# EAGLE board 4bit Arithmetic Unit (EAGLE 8.7.0)
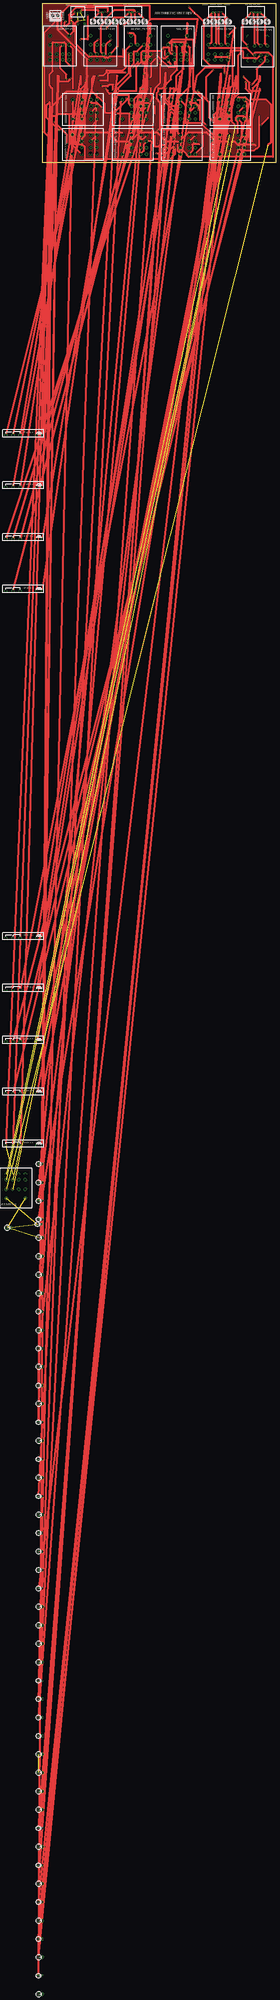
[diagram p0: board, top side]
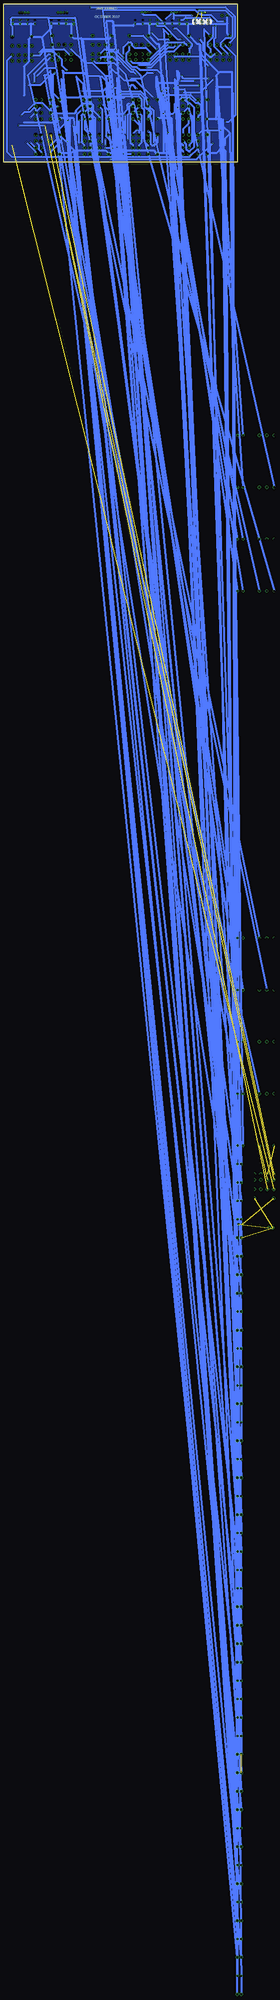
[diagram p1: board, bottom side, seen from below]

Size 161.27 x 108.89 mm. Coordinates in mm from the lower left corner, seen from the top.
Outline: 0,0 161.27,0 161.27,108.89 0,108.89 0,0
Copper layers (1*16): Top 0.07mm / dielectric 30mil / Bottom 0.07mm
Design rules "OSH_PARK_RULES_custom *": minimum track width 55mil, minimum drill 10mil, track to track 6mil, track to pad 6mil, pad to pad 6mil, via to via 6mil, smd to smd 6mil, copper to edge 15mil, drill to drill 6mil, minimum pad ring 7mil, minimum via ring 7mil, stop-mask expansion 3mil, vias tented up to drill 0mil, thermal gap 10mil

## Footprints (pad centres in the part's own frame; a part is rotated, then mirrored left to right if it is on the bottom)
RAD2,5 = drill 1.016: A 1.27,0; C -1.27,0
RAD2.5_D2 = drill 1.397: A 1.27,0; C -1.27,0
PY14-02 = drill 1.3: 11 6.6,6.35; 12 6.6,16.7; 14 6.6,12.7; 21 2.2,6.35; 22 2.2,16.7; 24 2.2,12.7; 31 -2.2,6.35; 32 -2.2,16.7; 34 -2.2,12.7; 41 -6.6,6.35; 42 -6.6,16.7; 44 -6.6,12.7; A1 6.6,0; A2 -6.6,0
HF41F-12-Z = drill 1: 1 27.04,1.2; 2 23.26,1.2 | drill 1.3: 3 11.92,1.2; 4 6.88,1.2; 5 1.84,1.2
LED3MM = drill 0.813 octagon: A -1.27,0; K 1.27,0
55932-0330 = drill 0.8: 1 2,0; 2 0,0; 3 -2,0
55932-0430 = drill 0.8: 1 3,0; 2 1,0; 3 -1,0; 4 -3,0
1751248 = drill 1.1 pad 1.7: 1 -1.75,-0.1; 2 1.75,-0.1

## Placement (x,y rotation side)
ADDER8-1:ADDER1-0:D1  1N4007  [RAD2,5]  -1.27,-943.6 0 top  (outside the outline)
ADDER8-1:ADDER1-0:D2  1N5359VERT_SML  [RAD2.5_D2]  -1.27,-994.4 0 top  (outside the outline)
ADDER8-1:ADDER1-0:D3  1N4007  [RAD2,5]  -1.27,-1045.2 0 top  (outside the outline)
ADDER8-1:ADDER1-0:D4  1N5359VERT_SML  [RAD2.5_D2]  -1.27,-1096 0 top  (outside the outline)
ADDER8-1:ADDER1-0:K1  PY14-02  [PY14-02]  20.83,12.19 270 top
ADDER8-1:ADDER1-0:K2  PY14-02  [PY14-02]  20.95,36.2 270 top
ADDER8-1:ADDER1-1:D1  1N4007  [RAD2,5]  -1.27,-956.3 0 top  (outside the outline)
ADDER8-1:ADDER1-1:D2  1N5359VERT_SML  [RAD2.5_D2]  -1.27,-1007.1 0 top  (outside the outline)
ADDER8-1:ADDER1-1:D3  1N4007  [RAD2,5]  -1.27,-1057.9 0 top  (outside the outline)
ADDER8-1:ADDER1-1:D4  1N5359VERT_SML  [RAD2.5_D2]  -1.27,-1108.7 0 top  (outside the outline)
ADDER8-1:ADDER1-1:K1  PY14-02  [PY14-02]  55.24,12.06 270 top
ADDER8-1:ADDER1-1:K2  PY14-02  [PY14-02]  55.24,36.2 270 top
ADDER8-1:ADDER1-2:D1  1N4007  [RAD2,5]  -1.27,-969 0 top  (outside the outline)
ADDER8-1:ADDER1-2:D2  1N5359VERT_SML  [RAD2.5_D2]  -1.27,-1019.8 0 top  (outside the outline)
ADDER8-1:ADDER1-2:D3  1N4007  [RAD2,5]  -1.27,-1070.6 0 top  (outside the outline)
ADDER8-1:ADDER1-2:D4  1N5359VERT_SML  [RAD2.5_D2]  -1.27,-1121.4 0 top  (outside the outline)
ADDER8-1:ADDER1-2:K1  PY14-02  [PY14-02]  88.9,12.06 270 top
ADDER8-1:ADDER1-2:K2  PY14-02  [PY14-02]  88.9,36.2 270 top
ADDER8-1:ADDER1-3:D1  1N4007  [RAD2,5]  -1.27,-981.7 0 top  (outside the outline)
ADDER8-1:ADDER1-3:D2  1N5359VERT_SML  [RAD2.5_D2]  -1.27,-1032.5 0 top  (outside the outline)
ADDER8-1:ADDER1-3:D3  1N4007  [RAD2,5]  -1.27,-1083.3 0 top  (outside the outline)
ADDER8-1:ADDER1-3:D4  1N5359VERT_SML  [RAD2.5_D2]  -1.27,-1134.1 0 top  (outside the outline)
ADDER8-1:ADDER1-3:K1  PY14-02  [PY14-02]  122.56,12.06 270 top
ADDER8-1:ADDER1-3:K2  PY14-02  [PY14-02]  122.56,36.2 270 top
ADDER8-1:D1  1N4007  [RAD2,5]  -1.27,-1248.4 0 top  (outside the outline)
ADDER8-1:D2  1N5359VERT_SML  [RAD2.5_D2]  -1.27,-1261.1 0 top  (outside the outline)
ADDER8-1:D3  1N4007  [RAD2,5]  -2.03,-731.01 0 top  (outside the outline)
ADDER8-1:D4  1N5359VERT_SML  [RAD2.5_D2]  -22.86,-733.55 0 top  (outside the outline)
ADDER8-1:K1  HF41F-12-Z  [HF41F-12-Z]  -27.04,-678.1 0 top  (outside the outline)
ADDER8-1:K2  PY14-02  [PY14-02]  -18.29,-713.23 0 top  (outside the outline)
ENABLE4-1:D1  1N4007  [RAD2,5]  -1.27,-689.6 0 top  (outside the outline)
ENABLE4-1:D2  1N5359VERT_SML  [RAD2.5_D2]  -1.27,-740.4 0 top  (outside the outline)
ENABLE4-1:K1  PY14-02  [PY14-02]  12.06,87 180 top
ENABLE4-2:D1  1N4007  [RAD2,5]  -1.27,-702.3 0 top  (outside the outline)
ENABLE4-2:D2  1N5359VERT_SML  [RAD2.5_D2]  -1.27,-753.1 0 top  (outside the outline)
ENABLE4-2:K1  PY14-02  [PY14-02]  40.01,87 180 top
ENABLE4-3:D1  1N4007  [RAD2,5]  -1.27,-715 0 top  (outside the outline)
ENABLE4-3:D2  1N5359VERT_SML  [RAD2.5_D2]  -1.27,-765.8 0 top  (outside the outline)
ENABLE4-3:K1  PY14-02  [PY14-02]  121.28,87 180 top
ENABLE4-4:D1  1N4007  [RAD2,5]  -1.27,-727.7 0 top  (outside the outline)
ENABLE4-4:D2  1N5359VERT_SML  [RAD2.5_D2]  -1.27,-778.5 0 top  (outside the outline)
ENABLE4-4:K1  PY14-02  [PY14-02]  148.59,86.36 180 top
INC/DEC_FILTER1:D1  1N4007  [RAD2,5]  -1.27,-791.2 0 top  (outside the outline)
INC/DEC_FILTER1:D2  1N5359VERT_SML  [RAD2.5_D2]  -1.27,-803.9 0 top  (outside the outline)
INC/DEC_FILTER1:K1  PY14-02  [PY14-02]  67.94,87 180 top
INPUT3-1:LED0  [LED3MM]  29.21,96.52 270 bottom
INPUT3-1:LED1  [LED3MM]  24.64,96.52 270 bottom
INPUT3-1:LED2  [LED3MM]  20.07,96.52 270 bottom
INPUT3-1:X1  55932-0330  [55932-0330]  24.51,102.87 180 top
INPUT4-1:LED0  [LED3MM]  50.16,96.52 270 top
INPUT4-1:LED1  [LED3MM]  45.09,96.52 270 top
INPUT4-1:LED2  [LED3MM]  40.01,96.52 270 top
INPUT4-1:LED3  [LED3MM]  34.92,96.52 270 top
INPUT4-1:X1  55932-0430  [55932-0430]  42.55,102.87 180 top
INPUT4-2:LED0  [LED3MM]  70.48,96.52 270 top
INPUT4-2:LED1  [LED3MM]  65.41,96.52 270 top
INPUT4-2:LED2  [LED3MM]  60.33,96.52 270 top
INPUT4-2:LED3  [LED3MM]  55.24,96.52 270 top
INPUT4-2:X1  55932-0430  [55932-0430]  62.87,102.87 180 top
OUTPUT4-1:LED0  [LED3MM]  154.94,96.52 270 top
OUTPUT4-1:LED1  [LED3MM]  149.86,96.52 270 top
OUTPUT4-1:LED2  [LED3MM]  144.78,96.52 270 top
OUTPUT4-1:LED3  [LED3MM]  139.7,96.52 270 top
OUTPUT4-1:X1  55932-0430  [55932-0430]  147.32,102.87 180 top
OUTPUT4-2:LED0  [LED3MM]  128.27,96.52 270 top
OUTPUT4-2:LED1  [LED3MM]  123.19,96.52 270 top
OUTPUT4-2:LED2  [LED3MM]  118.11,96.52 270 top
OUTPUT4-2:LED3  [LED3MM]  113.03,96.52 270 top
OUTPUT4-2:X1  55932-0430  [55932-0430]  120.65,102.87 180 top
PWR_BLK:PWR  PWR_BLK  [1751248]  8.89,100.97 0 top
SUB_XOR1:D1  1N4007  [RAD2,5]  -1.27,-816.6 0 top  (outside the outline)
SUB_XOR1:D2  1N5359VERT_SML  [RAD2.5_D2]  -1.27,-829.3 0 top  (outside the outline)
SUB_XOR1:D3  1N4007  [RAD2,5]  -1.27,-842 0 top  (outside the outline)
SUB_XOR1:D4  1N5359VERT_SML  [RAD2.5_D2]  -1.27,-854.7 0 top  (outside the outline)
SUB_XOR1:D5  1N4007  [RAD2,5]  -1.27,-867.4 0 top  (outside the outline)
SUB_XOR1:D6  1N5359VERT_SML  [RAD2.5_D2]  -1.27,-880.1 0 top  (outside the outline)
SUB_XOR1:D7  1N4007  [RAD2,5]  -1.27,-892.8 0 top  (outside the outline)
SUB_XOR1:D8  1N5359VERT_SML  [RAD2.5_D2]  -1.27,-905.5 0 top  (outside the outline)
SUB_XOR1:D9  1N4007  [RAD2,5]  -1.27,-918.2 0 top  (outside the outline)
SUB_XOR1:D10  1N5359VERT_SML  [RAD2.5_D2]  -1.27,-930.9 0 top  (outside the outline)
SUB_XOR1:K1  PY14-02  [PY14-02]  93.34,87 180 top
SUB_XOR1:K2  HF41F-12-Z  [HF41F-12-Z]  -27.04,-189.3 0 top  (outside the outline)
SUB_XOR1:K3  HF41F-12-Z  [HF41F-12-Z]  -27.04,-225 0 top  (outside the outline)
SUB_XOR1:K4  HF41F-12-Z  [HF41F-12-Z]  -27.04,-260.7 0 top  (outside the outline)
SUB_XOR1:K5  HF41F-12-Z  [HF41F-12-Z]  -27.04,-296.4 0 top  (outside the outline)
ZERO_DETECT1:D1  1N4007  [RAD2,5]  -1.27,-1146.8 0 top  (outside the outline)
ZERO_DETECT1:D2  1N5359VERT_SML  [RAD2.5_D2]  -1.27,-1159.5 0 top  (outside the outline)
ZERO_DETECT1:D3  1N4007  [RAD2,5]  -1.27,-1172.2 0 top  (outside the outline)
ZERO_DETECT1:D4  1N5359VERT_SML  [RAD2.5_D2]  -1.27,-1184.9 0 top  (outside the outline)
ZERO_DETECT1:D5  1N4007  [RAD2,5]  -1.27,-1197.6 0 top  (outside the outline)
ZERO_DETECT1:D6  1N5359VERT_SML  [RAD2.5_D2]  -1.27,-1210.3 0 top  (outside the outline)
ZERO_DETECT1:D7  1N4007  [RAD2,5]  -1.27,-1223 0 top  (outside the outline)
ZERO_DETECT1:D8  1N5359VERT_SML  [RAD2.5_D2]  -1.27,-1235.7 0 top  (outside the outline)
ZERO_DETECT1:K1  HF41F-12-Z  [HF41F-12-Z]  -27.04,-535.3 0 top  (outside the outline)
ZERO_DETECT1:K2  HF41F-12-Z  [HF41F-12-Z]  -27.04,-571 0 top  (outside the outline)
ZERO_DETECT1:K3  HF41F-12-Z  [HF41F-12-Z]  -27.04,-606.7 0 top  (outside the outline)
ZERO_DETECT1:K4  HF41F-12-Z  [HF41F-12-Z]  -27.04,-642.4 0 top  (outside the outline)

## Library data of the parts
ADDER8-1:ADDER1-0:D1-ADDER8-1:ADDER1-0:D4 ADDER8-1:ADDER1-0:K1 ADDER8-1:ADDER1-0:K2 ADDER8-1:ADDER1-1:D1-ADDER8-1:ADDER1-1:D4 ADDER8-1:ADDER1-1:K1 ADDER8-1:ADDER1-1:K2 ADDER8-1:ADDER1-2:D1-ADDER8-1:ADDER1-2:D4 ADDER8-1:ADDER1-2:K1 ADDER8-1:ADDER1-2:K2 ADDER8-1:ADDER1-3:D1-ADDER8-1:ADDER1-3:D4 ADDER8-1:ADDER1-3:K1 ADDER8-1:ADDER1-3:K2 ADDER8-1:D1-ADDER8-1:D4 ADDER8-1:K1 ADDER8-1:K2 ENABLE4-1:D1 ENABLE4-1:D2 ENABLE4-1:K1 ENABLE4-2:D1 ENABLE4-2:D2 ENABLE4-2:K1 ENABLE4-3:D1 ENABLE4-3:D2 ENABLE4-3:K1 ENABLE4-4:D1 ENABLE4-4:D2 ENABLE4-4:K1 INC/DEC_FILTER1:D1 INC/DEC_FILTER1:D2 INC/DEC_FILTER1:K1 INPUT3-1:LED0 INPUT3-1:LED1 INPUT3-1:LED2 INPUT3-1:X1 INPUT4-1:LED0 INPUT4-1:LED1-INPUT4-1:LED3 INPUT4-1:X1 INPUT4-2:LED0 INPUT4-2:LED1-INPUT4-2:LED3 INPUT4-2:X1 OUTPUT4-1:LED0 OUTPUT4-1:LED1-OUTPUT4-1:LED3 OUTPUT4-1:X1 OUTPUT4-2:LED0 OUTPUT4-2:LED1-OUTPUT4-2:LED3 OUTPUT4-2:X1 SUB_XOR1:D1-SUB_XOR1:D10 SUB_XOR1:K1-SUB_XOR1:K5 ZERO_DETECT1:D1-ZERO_DETECT1:D8 ZERO_DETECT1:K1-ZERO_DETECT1:K4 = relay_computer_custom
PWR_BLK:PWR = relay_computer_custom; OC_FARNELL: unknown; OC_NEWARK: unknown

## Nets
+12V: ADDER8-1:ADDER1-0:K1.31 ADDER8-1:ADDER1-1:K1.31 ADDER8-1:ADDER1-2:K1.31 ADDER8-1:ADDER1-3:K1.31 ADDER8-1:K1.4 INC/DEC_FILTER1:K1.44 PWR_BLK:PWR.2 SUB_XOR1:K2.4 SUB_XOR1:K3.4 SUB_XOR1:K4.4 SUB_XOR1:K5.4
ADDER8-1:ADDER1-0:D$1: ADDER8-1:ADDER1-0:D1.A ADDER8-1:ADDER1-0:D2.A
ADDER8-1:ADDER1-0:D$2: ADDER8-1:ADDER1-0:D3.A ADDER8-1:ADDER1-0:D4.A
ADDER8-1:ADDER1-0:N$1: ADDER8-1:ADDER1-0:K1.12 ADDER8-1:ADDER1-0:K2.44
ADDER8-1:ADDER1-0:N$2: ADDER8-1:ADDER1-0:K1.14 ADDER8-1:ADDER1-0:K1.32 ADDER8-1:ADDER1-0:K2.42
ADDER8-1:ADDER1-0:N$3: ADDER8-1:ADDER1-0:K1.22 ADDER8-1:ADDER1-0:K2.22 ADDER8-1:ADDER1-0:K2.34
ADDER8-1:ADDER1-0:N$4: ADDER8-1:ADDER1-0:K1.24 ADDER8-1:ADDER1-0:K2.24 ADDER8-1:ADDER1-0:K2.32
ADDER8-1:ADDER1-0:N$5: ADDER8-1:ADDER1-0:K1.44 ADDER8-1:ADDER1-0:K2.12
ADDER8-1:ADDER1-0:N$6: ADDER8-1:ADDER1-0:K1.34 ADDER8-1:ADDER1-0:K1.42 ADDER8-1:ADDER1-0:K2.14
ADDER8-1:ADDER1-1:D$1: ADDER8-1:ADDER1-1:D1.A ADDER8-1:ADDER1-1:D2.A
ADDER8-1:ADDER1-1:D$2: ADDER8-1:ADDER1-1:D3.A ADDER8-1:ADDER1-1:D4.A
ADDER8-1:ADDER1-1:N$1: ADDER8-1:ADDER1-1:K1.12 ADDER8-1:ADDER1-1:K2.44
ADDER8-1:ADDER1-1:N$2: ADDER8-1:ADDER1-1:K1.14 ADDER8-1:ADDER1-1:K1.32 ADDER8-1:ADDER1-1:K2.42
ADDER8-1:ADDER1-1:N$3: ADDER8-1:ADDER1-1:K1.22 ADDER8-1:ADDER1-1:K2.22 ADDER8-1:ADDER1-1:K2.34
ADDER8-1:ADDER1-1:N$4: ADDER8-1:ADDER1-1:K1.24 ADDER8-1:ADDER1-1:K2.24 ADDER8-1:ADDER1-1:K2.32
ADDER8-1:ADDER1-1:N$5: ADDER8-1:ADDER1-1:K1.44 ADDER8-1:ADDER1-1:K2.12
ADDER8-1:ADDER1-1:N$6: ADDER8-1:ADDER1-1:K1.34 ADDER8-1:ADDER1-1:K1.42 ADDER8-1:ADDER1-1:K2.14
ADDER8-1:ADDER1-2:D$1: ADDER8-1:ADDER1-2:D1.A ADDER8-1:ADDER1-2:D2.A
ADDER8-1:ADDER1-2:D$2: ADDER8-1:ADDER1-2:D3.A ADDER8-1:ADDER1-2:D4.A
ADDER8-1:ADDER1-2:N$1: ADDER8-1:ADDER1-2:K1.12 ADDER8-1:ADDER1-2:K2.44
ADDER8-1:ADDER1-2:N$2: ADDER8-1:ADDER1-2:K1.14 ADDER8-1:ADDER1-2:K1.32 ADDER8-1:ADDER1-2:K2.42
ADDER8-1:ADDER1-2:N$3: ADDER8-1:ADDER1-2:K1.22 ADDER8-1:ADDER1-2:K2.22 ADDER8-1:ADDER1-2:K2.34
ADDER8-1:ADDER1-2:N$4: ADDER8-1:ADDER1-2:K1.24 ADDER8-1:ADDER1-2:K2.24 ADDER8-1:ADDER1-2:K2.32
ADDER8-1:ADDER1-2:N$5: ADDER8-1:ADDER1-2:K1.44 ADDER8-1:ADDER1-2:K2.12
ADDER8-1:ADDER1-2:N$6: ADDER8-1:ADDER1-2:K1.34 ADDER8-1:ADDER1-2:K1.42 ADDER8-1:ADDER1-2:K2.14
ADDER8-1:ADDER1-3:D$1: ADDER8-1:ADDER1-3:D1.A ADDER8-1:ADDER1-3:D2.A
ADDER8-1:ADDER1-3:D$2: ADDER8-1:ADDER1-3:D3.A ADDER8-1:ADDER1-3:D4.A
ADDER8-1:ADDER1-3:N$1: ADDER8-1:ADDER1-3:K1.12 ADDER8-1:ADDER1-3:K2.44
ADDER8-1:ADDER1-3:N$2: ADDER8-1:ADDER1-3:K1.14 ADDER8-1:ADDER1-3:K1.32 ADDER8-1:ADDER1-3:K2.42
ADDER8-1:ADDER1-3:N$3: ADDER8-1:ADDER1-3:K1.22 ADDER8-1:ADDER1-3:K2.22 ADDER8-1:ADDER1-3:K2.34
ADDER8-1:ADDER1-3:N$4: ADDER8-1:ADDER1-3:K1.24 ADDER8-1:ADDER1-3:K2.24 ADDER8-1:ADDER1-3:K2.32
ADDER8-1:ADDER1-3:N$5: ADDER8-1:ADDER1-3:K1.44 ADDER8-1:ADDER1-3:K2.12
ADDER8-1:ADDER1-3:N$6: ADDER8-1:ADDER1-3:K1.34 ADDER8-1:ADDER1-3:K1.42 ADDER8-1:ADDER1-3:K2.14
ADDER8-1:D$1: ADDER8-1:D1.A ADDER8-1:D2.A
ADDER8-1:D$2: ADDER8-1:D3.A ADDER8-1:D4.A
ADDER8-1:IN: ADDER8-1:D3.C ADDER8-1:K2.A2
ADDER8-1:IN1: ADDER8-1:ADDER1-2:K2.11 ADDER8-1:ADDER1-3:K1.41 ADDER8-1:ADDER1-3:K2.21 ADDER8-1:K2.42
ADDER8-1:N$1: ADDER8-1:ADDER1-0:K2.11 ADDER8-1:ADDER1-1:K1.41 ADDER8-1:ADDER1-1:K2.21
ADDER8-1:N$2: ADDER8-1:ADDER1-0:K2.41 ADDER8-1:ADDER1-1:K1.11 ADDER8-1:ADDER1-1:K2.31
ADDER8-1:N$3: ADDER8-1:ADDER1-1:K2.11 ADDER8-1:ADDER1-2:K1.41 ADDER8-1:ADDER1-2:K2.21
ADDER8-1:N$4: ADDER8-1:ADDER1-1:K2.41 ADDER8-1:ADDER1-2:K1.11 ADDER8-1:ADDER1-2:K2.31
ADDER8-1:N$5: ADDER8-1:ADDER1-3:K2.11
ADDER8-1:N$6: ADDER8-1:ADDER1-2:K2.41 ADDER8-1:ADDER1-3:K1.11 ADDER8-1:ADDER1-3:K2.31 ADDER8-1:K2.44
ADDER8-1:N$7: ADDER8-1:ADDER1-0:K1.11 ADDER8-1:ADDER1-0:K2.31 ADDER8-1:K1.3 ADDER8-1:K2.34
ADDER8-1:N$8: ADDER8-1:ADDER1-3:K2.41
ADDER8-1:N$9: ADDER8-1:ADDER1-0:K1.41 ADDER8-1:ADDER1-0:K2.21 ADDER8-1:K1.5 ADDER8-1:K2.32
AUE: ENABLE4-1:D1.C ENABLE4-1:K1.A2 ENABLE4-2:D1.C ENABLE4-2:K1.A2 ENABLE4-3:D1.C ENABLE4-3:K1.A2 ENABLE4-4:D1.C ENABLE4-4:K1.A2 INPUT3-1:LED2.A INPUT3-1:X1.1
CARRY: ENABLE4-3:K1.11 OUTPUT4-2:LED3.A OUTPUT4-2:X1.1
ENABLE4-1:D$1: ENABLE4-1:D1.A ENABLE4-1:D2.A
ENABLE4-2:D$1: ENABLE4-2:D1.A ENABLE4-2:D2.A
ENABLE4-3:D$1: ENABLE4-3:D1.A ENABLE4-3:D2.A
ENABLE4-4:D$1: ENABLE4-4:D1.A ENABLE4-4:D2.A
GND: ADDER8-1:ADDER1-0:D2.C ADDER8-1:ADDER1-0:D4.C ADDER8-1:ADDER1-0:K1.A1 ADDER8-1:ADDER1-0:K2.A1 ADDER8-1:ADDER1-1:D2.C ADDER8-1:ADDER1-1:D4.C ADDER8-1:ADDER1-1:K1.A1 ADDER8-1:ADDER1-1:K2.A1 ADDER8-1:ADDER1-2:D2.C ADDER8-1:ADDER1-2:D4.C ADDER8-1:ADDER1-2:K1.A1 ADDER8-1:ADDER1-2:K2.A1 ADDER8-1:ADDER1-3:D2.C ADDER8-1:ADDER1-3:D4.C ADDER8-1:ADDER1-3:K1.A1 ADDER8-1:ADDER1-3:K2.A1 ADDER8-1:D2.C ADDER8-1:D4.C ADDER8-1:K1.2 ADDER8-1:K2.A1 ENABLE4-1:D2.C ENABLE4-1:K1.A1 ENABLE4-2:D2.C ENABLE4-2:K1.A1 ENABLE4-3:D2.C ENABLE4-3:K1.A1 ENABLE4-4:D2.C ENABLE4-4:K1.A1 INC/DEC_FILTER1:D2.C INC/DEC_FILTER1:K1.A1 INPUT3-1:LED0.K INPUT3-1:LED1.K INPUT3-1:LED2.K INPUT4-1:LED0.K INPUT4-1:LED1.K INPUT4-1:LED2.K INPUT4-1:LED3.K INPUT4-2:LED0.K INPUT4-2:LED1.K INPUT4-2:LED2.K INPUT4-2:LED3.K OUTPUT4-1:LED0.K OUTPUT4-1:LED1.K OUTPUT4-1:LED2.K OUTPUT4-1:LED3.K OUTPUT4-2:LED0.K OUTPUT4-2:LED1.K OUTPUT4-2:LED2.K OUTPUT4-2:LED3.K PWR_BLK:PWR.1 SUB_XOR1:D2.C SUB_XOR1:D4.C SUB_XOR1:D6.C SUB_XOR1:D8.C SUB_XOR1:D10.C SUB_XOR1:K1.A1 SUB_XOR1:K2.2 SUB_XOR1:K3.2 SUB_XOR1:K4.2 SUB_XOR1:K5.2
INC/DEC: INC/DEC_FILTER1:D1.C INC/DEC_FILTER1:K1.A2 INPUT3-1:LED0.A INPUT3-1:X1.3
INC/DEC_FILTER1:D$1: INC/DEC_FILTER1:D1.A INC/DEC_FILTER1:D2.A
INPUT3-1:IN1: INPUT3-1:LED1.A INPUT3-1:X1.2
N$1: ENABLE4-1:K1.44 INPUT4-1:LED0.A INPUT4-1:X1.4
N$2: ENABLE4-1:K1.34 INPUT4-1:LED1.A INPUT4-1:X1.3
N$3: ENABLE4-1:K1.24 INPUT4-1:LED2.A INPUT4-1:X1.2
N$4: ENABLE4-1:K1.14 INPUT4-1:LED3.A INPUT4-1:X1.1
N$5: ENABLE4-2:K1.44 INPUT4-2:LED0.A INPUT4-2:X1.4
N$6: ENABLE4-2:K1.34 INPUT4-2:LED1.A INPUT4-2:X1.3
N$7: ENABLE4-2:K1.24 INPUT4-2:LED2.A INPUT4-2:X1.2
N$8: ENABLE4-2:K1.14 INPUT4-2:LED3.A INPUT4-2:X1.1
N$9: ENABLE4-2:K1.11 INC/DEC_FILTER1:K1.12
N$10: ENABLE4-2:K1.21 INC/DEC_FILTER1:K1.22
N$11: ENABLE4-2:K1.31 INC/DEC_FILTER1:K1.32
N$12: ENABLE4-2:K1.41 INC/DEC_FILTER1:K1.42
N$13: ADDER8-1:ADDER1-0:D3.C ADDER8-1:ADDER1-0:K2.A2 ENABLE4-1:K1.41
N$14: ADDER8-1:ADDER1-1:D3.C ADDER8-1:ADDER1-1:K2.A2 ENABLE4-1:K1.31
N$15: ADDER8-1:ADDER1-2:D3.C ADDER8-1:ADDER1-2:K2.A2 ENABLE4-1:K1.21
N$16: ADDER8-1:ADDER1-3:D3.C ADDER8-1:ADDER1-3:K2.A2 ENABLE4-1:K1.11
N$17: INC/DEC_FILTER1:K1.41 SUB_XOR1:D9.C SUB_XOR1:K5.1
N$18: INC/DEC_FILTER1:K1.31 SUB_XOR1:D7.C SUB_XOR1:K4.1
N$19: INC/DEC_FILTER1:K1.21 SUB_XOR1:D5.C SUB_XOR1:K3.1
N$20: INC/DEC_FILTER1:K1.11 SUB_XOR1:D3.C SUB_XOR1:K2.1
N$21: ADDER8-1:ADDER1-3:D1.C ADDER8-1:ADDER1-3:K1.A2 SUB_XOR1:K1.11
N$22: ADDER8-1:ADDER1-2:D1.C ADDER8-1:ADDER1-2:K1.A2 SUB_XOR1:K1.21
N$23: ADDER8-1:ADDER1-1:D1.C ADDER8-1:ADDER1-1:K1.A2 SUB_XOR1:K1.31
N$24: ADDER8-1:ADDER1-0:D1.C ADDER8-1:ADDER1-0:K1.A2 SUB_XOR1:K1.41
N$25: ADDER8-1:K2.31 ENABLE4-3:K1.14
N$26: ENABLE4-3:K1.44 ZERO_DETECT1:K4.3
N$40: ADDER8-1:ADDER1-0:K1.21 ENABLE4-4:K1.44 ZERO_DETECT1:D7.C ZERO_DETECT1:K4.1
N$41: ADDER8-1:ADDER1-1:K1.21 ENABLE4-4:K1.34 ZERO_DETECT1:D5.C ZERO_DETECT1:K3.1
N$42: ADDER8-1:ADDER1-2:K1.21 ENABLE4-4:K1.24 ZERO_DETECT1:D3.C ZERO_DETECT1:K2.1
N$43: ADDER8-1:ADDER1-3:K1.21 ENABLE4-3:K1.34 ENABLE4-4:K1.14 ZERO_DETECT1:D1.C ZERO_DETECT1:K1.1
N$44: ADDER8-1:K2.41 ENABLE4-3:K1.24
OVERFLOW: ENABLE4-3:K1.21 OUTPUT4-2:LED2.A OUTPUT4-2:X1.2
R0: ENABLE4-4:K1.41 OUTPUT4-1:LED0.A OUTPUT4-1:X1.4
R1: ENABLE4-4:K1.31 OUTPUT4-1:LED1.A OUTPUT4-1:X1.3
R2: ENABLE4-4:K1.21 OUTPUT4-1:LED2.A OUTPUT4-1:X1.2
R3: ENABLE4-4:K1.11 OUTPUT4-1:LED3.A OUTPUT4-1:X1.1
SIGN: ENABLE4-3:K1.31 OUTPUT4-2:LED1.A OUTPUT4-2:X1.3
SUB: ADDER8-1:D1.C ADDER8-1:K1.1 SUB_XOR1:D1.C SUB_XOR1:K1.A2
SUB_XOR1:D$1: SUB_XOR1:D1.A SUB_XOR1:D2.A
SUB_XOR1:D$2: SUB_XOR1:D3.A SUB_XOR1:D4.A
SUB_XOR1:D$3: SUB_XOR1:D5.A SUB_XOR1:D6.A
SUB_XOR1:D$4: SUB_XOR1:D7.A SUB_XOR1:D8.A
SUB_XOR1:D$5: SUB_XOR1:D9.A SUB_XOR1:D10.A
SUB_XOR1:N$1: SUB_XOR1:K1.42 SUB_XOR1:K5.5
SUB_XOR1:N$2: SUB_XOR1:K1.44 SUB_XOR1:K5.3
SUB_XOR1:N$3: SUB_XOR1:K1.34 SUB_XOR1:K4.3
SUB_XOR1:N$4: SUB_XOR1:K1.32 SUB_XOR1:K4.5
SUB_XOR1:N$5: SUB_XOR1:K1.24 SUB_XOR1:K3.3
SUB_XOR1:N$6: SUB_XOR1:K1.22 SUB_XOR1:K3.5
SUB_XOR1:N$7: SUB_XOR1:K1.14 SUB_XOR1:K2.3
SUB_XOR1:N$8: SUB_XOR1:K1.12 SUB_XOR1:K2.5
ZERO: ENABLE4-3:K1.41 OUTPUT4-2:LED0.A OUTPUT4-2:X1.4
ZERO_DETECT1:+12V: ZERO_DETECT1:K1.4
ZERO_DETECT1:D$1: ZERO_DETECT1:D1.A ZERO_DETECT1:D2.A
ZERO_DETECT1:D$2: ZERO_DETECT1:D3.A ZERO_DETECT1:D4.A
ZERO_DETECT1:D$3: ZERO_DETECT1:D5.A ZERO_DETECT1:D6.A
ZERO_DETECT1:D$4: ZERO_DETECT1:D7.A ZERO_DETECT1:D8.A
ZERO_DETECT1:GND: ZERO_DETECT1:D2.C ZERO_DETECT1:D4.C ZERO_DETECT1:D6.C ZERO_DETECT1:D8.C ZERO_DETECT1:K1.2 ZERO_DETECT1:K2.2 ZERO_DETECT1:K3.2 ZERO_DETECT1:K4.2
ZERO_DETECT1:N$2: ZERO_DETECT1:K1.3 ZERO_DETECT1:K2.4
ZERO_DETECT1:N$3: ZERO_DETECT1:K2.3 ZERO_DETECT1:K3.4
ZERO_DETECT1:N$4: ZERO_DETECT1:K3.3 ZERO_DETECT1:K4.4

## Tracks (layer width: path | path; a pad name or v marks a point on that pad's centre or on a via)
+12V
  Top 1.397: PWR_BLK:PWR.2 10.79,100.65 10.79,91.12 31.11,70.8 31.11,59.69 SUB_XOR1:K2.4 31.11,59.05 31.11,50.48 SUB_XOR1:K3.4 31.11,49.85 29.53,48.26 29.21,48.26 | INC/DEC_FILTER1:K1.44 74.3,74.3 74.3,72.71 72.39,70.8 72.39,60.01 SUB_XOR1:K5.4 72.07,59.37 72.39,59.05 72.39,50.8 SUB_XOR1:K4.4 72.39,50.16 66.04,43.81 66.04,20.32 66.52,19.84 | 147,11.43 146.69,11.75 134.94,11.75 132.72,13.97 128.91,13.97 ADDER8-1:ADDER1-3:K1.31 128.27,14.29 119.7,14.29 113.35,20.64 100.97,20.64 95.25,14.92 ADDER8-1:ADDER1-2:K1.31 95.25,14.29 85.41,14.29 79.06,20.64 67.31,20.64 66.52,19.84 | 29.21,48.26 16.51,48.26 5.4,37.15 5.4,36.51 ADDER8-1:K1.4 | 29.21,48.26 29.21,20.64 | 29.21,20.64 29.21,18.1 27.3,16.19 27.3,14.61 ADDER8-1:ADDER1-0:K1.31 | 29.21,20.64 44.77,20.64 51.12,14.29 61.59,14.29 ADDER8-1:ADDER1-1:K1.31 61.59,14.92 66.52,19.84
  pour Top (isolate 0.406): 0,109.22 161.54,109.22 161.54,0 0,0
ADDER8-1:ADDER1-0:D$1
  Bottom 1.397: ADDER8-1:ADDER1-0:D2.A ADDER8-1:ADDER1-0:D1.A
ADDER8-1:ADDER1-0:D$2
  Bottom 1.397: ADDER8-1:ADDER1-0:D4.A ADDER8-1:ADDER1-0:D3.A
ADDER8-1:ADDER1-0:N$1  (via drill 0.25)
  Top 1.397: v41.27,37.47 37.78,40.96 33.66,40.96 ADDER8-1:ADDER1-0:K2.44
  Bottom 1.397: v41.27,37.47 41.27,11.11 37.78,7.62 37.78,5.71 ADDER8-1:ADDER1-0:K1.12
ADDER8-1:ADDER1-0:N$2
  Bottom 1.397: 33.66,7.3 33.66,5.71 ADDER8-1:ADDER1-0:K1.14 | 33.66,7.3 35.56,9.21 35.56,12.38 37.47,14.29 ADDER8-1:ADDER1-0:K1.32 | ADDER8-1:ADDER1-0:K2.42 37.47,42.55 36.2,42.55 33.97,40.32 32.7,40.32 29.84,37.47 29.84,10.48 33.02,7.3 33.66,7.3
ADDER8-1:ADDER1-0:N$3
  Bottom 1.397: ADDER8-1:ADDER1-0:K1.22 37.78,10.16 37.78,11.75 39.69,13.65 39.69,32.07 37.78,33.97 ADDER8-1:ADDER1-0:K2.22 37.47,34.29 33.66,38.1 ADDER8-1:ADDER1-0:K2.34
ADDER8-1:ADDER1-0:N$4
  Top 1.397: ADDER8-1:ADDER1-0:K2.32 37.47,38.1 33.66,34.29 ADDER8-1:ADDER1-0:K2.24
  Bottom 1.397: ADDER8-1:ADDER1-0:K1.24 33.34,10.16 33.34,11.75 31.43,13.65 31.43,31.75 33.66,33.97 ADDER8-1:ADDER1-0:K2.24
ADDER8-1:ADDER1-0:N$5  (via drill 0.25)
  Top 1.397: v33.66,24.45 37.47,28.26 37.47,29.53 ADDER8-1:ADDER1-0:K2.12
  Bottom 1.397: v33.66,24.45 33.66,19.05 ADDER8-1:ADDER1-0:K1.44
ADDER8-1:ADDER1-0:N$6
  Top 1.397: ADDER8-1:ADDER1-0:K1.34 33.66,14.61 37.47,18.41 37.47,18.73 ADDER8-1:ADDER1-0:K1.42
  Bottom 1.397: ADDER8-1:ADDER1-0:K2.14 33.66,26.67 37.47,22.86 37.47,19.05 ADDER8-1:ADDER1-0:K1.42
ADDER8-1:ADDER1-1:D$1
  Bottom 1.397: ADDER8-1:ADDER1-1:D2.A ADDER8-1:ADDER1-1:D1.A
ADDER8-1:ADDER1-1:D$2
  Bottom 1.397: ADDER8-1:ADDER1-1:D4.A ADDER8-1:ADDER1-1:D3.A
ADDER8-1:ADDER1-1:N$1  (via drill 0.25)
  Top 1.397: v78.74,5.71 83.19,5.71 v83.19,10.16 | v74.3,40.96 67.94,40.96 ADDER8-1:ADDER1-1:K2.44
  Bottom 1.397: v78.74,5.71 72.07,5.71 ADDER8-1:ADDER1-1:K1.12 | v83.19,10.16 90.81,17.78 90.81,30.48 88.27,33.02 79.06,33.02 76.2,35.88 76.2,39.05 v74.3,40.96
ADDER8-1:ADDER1-1:N$2  (via drill 0.25)
  Top 1.397: ADDER8-1:ADDER1-1:K1.14 67.94,5.71 69.85,7.62 69.85,12.06 71.75,13.97 ADDER8-1:ADDER1-1:K1.32 72.39,14.61 74.93,14.61 v75.56,15.24
  Bottom 1.397: v75.56,15.24 75.56,32.7 74.61,33.66 74.61,38.42 72.07,40.96 72.07,42.55 ADDER8-1:ADDER1-1:K2.42
ADDER8-1:ADDER1-1:N$3
  Bottom 1.397: ADDER8-1:ADDER1-1:K1.22 72.07,10.16 72.07,11.75 73.98,13.65 73.98,32.07 72.07,33.97 ADDER8-1:ADDER1-1:K2.22 71.75,34.29 67.94,38.1 ADDER8-1:ADDER1-1:K2.34
ADDER8-1:ADDER1-1:N$4
  Top 1.397: ADDER8-1:ADDER1-1:K2.32 71.75,38.1 67.94,34.29 ADDER8-1:ADDER1-1:K2.24
  Bottom 1.397: ADDER8-1:ADDER1-1:K1.24 67.94,11.43 66.04,13.34 66.04,32.07 67.94,33.97 ADDER8-1:ADDER1-1:K2.24
ADDER8-1:ADDER1-1:N$5
  Bottom 1.397: ADDER8-1:ADDER1-1:K1.44 67.94,21.27 67.63,21.59 67.63,25.4 71.75,29.53 ADDER8-1:ADDER1-1:K2.12
ADDER8-1:ADDER1-1:N$6  (via drill 0.25)
  Top 1.397: ADDER8-1:ADDER1-1:K1.34 67.94,14.29 71.75,18.1 71.75,18.41 ADDER8-1:ADDER1-1:K1.42 | v69.22,22.23 69.22,28.26 67.94,29.53 ADDER8-1:ADDER1-1:K2.14
  Bottom 1.397: v69.22,22.23 71.75,19.68 71.75,18.73 ADDER8-1:ADDER1-1:K1.42
ADDER8-1:ADDER1-2:D$1
  Bottom 1.397: ADDER8-1:ADDER1-2:D2.A ADDER8-1:ADDER1-2:D1.A
ADDER8-1:ADDER1-2:D$2
  Bottom 1.397: ADDER8-1:ADDER1-2:D4.A ADDER8-1:ADDER1-2:D3.A
ADDER8-1:ADDER1-2:N$1  (via drill 0.25)
  Top 1.397: v110.81,19.05 110.81,10.79 105.73,5.71 ADDER8-1:ADDER1-2:K1.12 | v107.63,35.88 107.63,39.05 105.73,40.96 101.6,40.96 ADDER8-1:ADDER1-2:K2.44
  Bottom 1.397: v110.81,19.05 110.81,32.7 v107.63,35.88
ADDER8-1:ADDER1-2:N$2  (via drill 0.25)
  Top 1.397: 104.62,13.18 105.41,13.97 ADDER8-1:ADDER1-2:K1.32 | 104.62,13.18 103.5,12.06 103.5,7.62 101.6,5.71 ADDER8-1:ADDER1-2:K1.14 | v109.22,28.57 109.22,42.55 105.73,42.55 ADDER8-1:ADDER1-2:K2.42 | v108.9,12.7 105.09,12.7 104.62,13.18
  Bottom 1.397: v109.22,28.57 109.22,13.02 v108.9,12.7
ADDER8-1:ADDER1-2:N$3
  Bottom 1.397: ADDER8-1:ADDER1-2:K1.22 105.73,10.16 105.73,11.75 107.63,13.65 107.63,32.07 105.73,33.97 ADDER8-1:ADDER1-2:K2.22 105.41,34.29 101.6,38.1 ADDER8-1:ADDER1-2:K2.34
ADDER8-1:ADDER1-2:N$4
  Top 1.397: ADDER8-1:ADDER1-2:K2.32 105.41,38.1 101.6,34.29 ADDER8-1:ADDER1-2:K2.24
  Bottom 1.397: ADDER8-1:ADDER1-2:K1.24 101.6,11.43 98.11,14.92 98.11,30.48 101.6,33.97 ADDER8-1:ADDER1-2:K2.24
ADDER8-1:ADDER1-2:N$5
  Bottom 1.397: ADDER8-1:ADDER1-2:K1.44 101.6,18.73 105.41,22.54 105.41,29.53 ADDER8-1:ADDER1-2:K2.12
ADDER8-1:ADDER1-2:N$6
  Top 1.397: ADDER8-1:ADDER1-2:K1.34 101.6,14.29 105.41,18.1 105.41,18.41 ADDER8-1:ADDER1-2:K1.42
  Bottom 1.397: ADDER8-1:ADDER1-2:K2.14 101.6,21.27 99.69,19.37 99.69,16.19 101.6,14.29 ADDER8-1:ADDER1-2:K1.34
ADDER8-1:ADDER1-3:D$1
  Bottom 1.397: ADDER8-1:ADDER1-3:D2.A ADDER8-1:ADDER1-3:D1.A
ADDER8-1:ADDER1-3:D$2
  Bottom 1.397: ADDER8-1:ADDER1-3:D4.A ADDER8-1:ADDER1-3:D3.A
ADDER8-1:ADDER1-3:N$1  (via drill 0.25)
  Top 1.397: v145.41,13.34 144.46,14.29 144.46,40.32 140.02,44.77 135.25,44.77 ADDER8-1:ADDER1-3:K2.44
  Bottom 1.397: v145.41,13.34 139.38,7.3 139.38,5.71 ADDER8-1:ADDER1-3:K1.12
ADDER8-1:ADDER1-3:N$2
  Top 1.397: ADDER8-1:ADDER1-3:K2.42 139.38,42.55 141.29,40.64 141.29,16.19 139.38,14.29 ADDER8-1:ADDER1-3:K1.32
  Bottom 1.397: ADDER8-1:ADDER1-3:K1.14 135.25,6.99 137.16,8.89 137.16,12.06 139.06,13.97 ADDER8-1:ADDER1-3:K1.32
ADDER8-1:ADDER1-3:N$3  (via drill 0.25)
  Top 1.397: v142.88,30.48 v142.88,13.65
  Bottom 1.397: v142.88,13.65 139.38,10.16 ADDER8-1:ADDER1-3:K1.22 | v142.88,30.48 139.38,33.97 ADDER8-1:ADDER1-3:K2.22 139.06,34.29 135.25,38.1 ADDER8-1:ADDER1-3:K2.34
ADDER8-1:ADDER1-3:N$4  (via drill 0.25)
  Top 1.397: v149.22,32.07 149.22,10.48 147.96,9.21 147.32,9.21 146.05,7.94 137.16,7.94 135.25,9.84 ADDER8-1:ADDER1-3:K1.24 | ADDER8-1:ADDER1-3:K2.24 135.25,34.29 139.06,38.1 ADDER8-1:ADDER1-3:K2.32
  Bottom 1.397: v149.22,32.07 147,34.29 143.19,34.29 139.38,38.1 ADDER8-1:ADDER1-3:K2.32
ADDER8-1:ADDER1-3:N$5
  Top 1.397: ADDER8-1:ADDER1-3:K1.44 135.25,18.73 134.62,19.37 134.62,27.62 133.35,28.89 133.35,30.48 134.3,31.43 139.06,31.43 139.06,29.84 ADDER8-1:ADDER1-3:K2.12
ADDER8-1:ADDER1-3:N$6
  Top 1.397: 138.27,17.3 139.06,18.1 139.06,18.41 ADDER8-1:ADDER1-3:K1.42 | 138.27,17.3 135.25,14.29 ADDER8-1:ADDER1-3:K1.34 | ADDER8-1:ADDER1-3:K2.14 135.25,29.53 137.79,26.99 137.79,17.78 138.27,17.3
ADDER8-1:D$1
  Bottom 1.397: ADDER8-1:D1.A 3.17,10.79 ADDER8-1:D2.A
ADDER8-1:D$2  (1 unrouted)
ADDER8-1:IN  (1 unrouted)
ADDER8-1:IN1  (1 unrouted)
  Top 1.397: ADDER8-1:ADDER1-3:K1.41 128.91,18.73 127,20.64 127,32.07 128.91,33.97 ADDER8-1:ADDER1-3:K2.21
  Bottom 1.397: ADDER8-1:ADDER1-2:K2.11 95.25,31.11 99.69,35.56 99.69,39.37 100.65,40.32 106.36,40.32 111.12,35.56 111.12,34.61 112.08,33.66 128.59,33.66 128.91,33.97 ADDER8-1:ADDER1-3:K2.21 128.59,34.61 134.3,40.32 140.02,40.32 144.15,36.2
ADDER8-1:N$1  (via drill 0.25)
  Top 1.397: 59.69,33.34 61.59,33.34 ADDER8-1:ADDER1-1:K2.21 | 59.69,33.34 v51.12,33.34 | 59.69,33.34 59.69,20.64 61.59,18.73 ADDER8-1:ADDER1-1:K1.41
  Bottom 1.397: ADDER8-1:ADDER1-0:K2.11 27.3,31.11 25.4,33.02 25.4,39.37 26.99,40.96 29.21,40.96 33.02,44.77 38.42,44.77 43.18,40.01 43.18,34.61 44.45,33.34 v51.12,33.34
ADDER8-1:N$2  (via drill 0.25)
  Top 1.397: v58.1,12.7 58.1,9.21 61.59,5.71 ADDER8-1:ADDER1-1:K1.11 | v51.12,46.04 59.69,46.04 59.69,40.32 61.59,38.42 ADDER8-1:ADDER1-1:K2.31
  Bottom 1.397: v58.1,12.7 58.1,35.56 60.64,38.1 61.59,38.1 ADDER8-1:ADDER1-1:K2.31 | v51.12,46.04 50.8,46.35 32.38,46.35 28.89,42.86 27.3,42.86 ADDER8-1:ADDER1-0:K2.41
ADDER8-1:N$3  (via drill 0.25)
  Top 1.397: v80.64,46.99 83.5,44.13 83.5,42.55 91.76,34.29 93.34,34.29 | 93.34,34.29 95.25,34.29 ADDER8-1:ADDER1-2:K2.21 | 93.34,34.29 93.34,20.64 95.25,18.73 ADDER8-1:ADDER1-2:K1.41
  Bottom 1.397: ADDER8-1:ADDER1-1:K2.11 61.59,31.11 59.69,33.02 59.69,34.92 61.28,36.51 62.55,36.51 64.45,38.42 64.45,44.13 67.31,46.99 v80.64,46.99
ADDER8-1:N$4  (via drill 0.25)
  Top 1.397: v93.34,12.7 93.34,7.62 95.25,5.71 ADDER8-1:ADDER1-2:K1.11 | v85.41,51.12 85.09,50.8 85.09,43.18 89.85,38.42 95.25,38.42 ADDER8-1:ADDER1-2:K2.31
  Bottom 1.397: v93.34,12.7 93.34,36.2 95.25,38.1 ADDER8-1:ADDER1-2:K2.31 | ADDER8-1:ADDER1-1:K2.41 61.59,43.5 66.99,48.9 80.33,48.9 82.55,51.12 v85.41,51.12
ADDER8-1:N$6  (via drill 0.25)  (1 unrouted)
  Top 1.397: v122.24,15.88 120.33,15.88 118.27,17.94 | 118.27,17.94 109.22,26.99 98.74,26.99 98.74,39.05 95.25,42.55 ADDER8-1:ADDER1-2:K2.41 | v123.83,38.1 118.75,33.02 118.75,18.41 118.27,17.94
  Bottom 1.397: ADDER8-1:ADDER1-3:K1.11 128.91,6.99 122.24,13.65 v122.24,15.88 | v123.83,38.1 128.91,38.1 ADDER8-1:ADDER1-3:K2.31
ADDER8-1:N$7  (1 unrouted)
  Top 1.397: 18.73,33.02 24.45,33.02 24.45,35.24 27.3,38.1 ADDER8-1:ADDER1-0:K2.31 | 18.73,33.02 11.11,33.02 9.53,31.43 5.4,31.43 ADDER8-1:K1.3 | 18.73,33.02 18.73,13.97 26.99,5.71 ADDER8-1:ADDER1-0:K1.11
ADDER8-1:N$9  (via drill 0.25)  (1 unrouted)
  Top 1.397: ADDER8-1:ADDER1-0:K2.21 27.3,33.66 25.4,31.75 25.4,20.64 26.99,19.05 ADDER8-1:ADDER1-0:K1.41 | v11.75,21.91 3.17,30.48 3.17,39.37 5.08,41.27 ADDER8-1:K1.5
  Bottom 1.397: v11.75,21.91 24.13,21.91 26.99,19.05 ADDER8-1:ADDER1-0:K1.41
AUE  (3 unrouted)
  Top 1.397: 22.23,102.87 20.32,100.97 20.32,97.16 21.59,95.89 21.59,89.85 18.73,87 ENABLE4-1:K1.A2 18.41,87.63 13.02,93.03 13.02,102.55 18.1,107.63 74.3,107.63 74.3,98.74 74.77,98.27 | ENABLE4-4:D1.C 132.72,92.71 132.72,91.76 127.95,87 ENABLE4-3:K1.A2 | ENABLE4-2:D1.C 73.03,91.44 73.03,96.52 74.77,98.27 | 74.77,98.27 74.93,98.42 107.31,98.42 ENABLE4-3:D1.C
  Bottom 1.397: ENABLE4-1:D1.C 23.18,91.44 18.73,87 ENABLE4-1:K1.A2 | ENABLE4-2:D1.C 51.12,91.44 46.67,87 ENABLE4-2:K1.A2 | ENABLE4-3:D1.C 112.08,99.38 129.86,99.38 130.33,98.9 | ENABLE4-4:D1.C 130.33,98.9 | ENABLE4-4:K1.A2 155.26,86.36 155.26,93.34 156.53,94.61 156.53,98.42 155.57,99.38 130.81,99.38 130.33,98.9
CARRY
  Top 1.397: 116.05,101.44 113.03,98.42 OUTPUT4-2:LED3.A | 116.05,101.44 117.47,102.87 OUTPUT4-2:X1.1 | ENABLE4-3:K1.11 114.94,80.64 116.52,82.23 116.52,100.97 116.05,101.44
ENABLE4-1:D$1
  Bottom 1.397: ENABLE4-1:D2.A ENABLE4-1:D1.A
ENABLE4-2:D$1
  Bottom 1.397: ENABLE4-2:D2.A ENABLE4-2:D1.A
ENABLE4-3:D$1
  Bottom 1.397: ENABLE4-3:D2.A ENABLE4-3:D1.A
ENABLE4-4:D$1
  Bottom 1.397: ENABLE4-4:D2.A ENABLE4-4:D1.A
GND  (3 unrouted)
  Bottom 1.397: 115.43,30.21 113.11,30.21 ADDER8-1:ADDER1-3:D4.C | 115.43,30.21 122.4,30.21 ADDER8-1:ADDER1-3:K2.A1 123.18,29.44 125.5,27.11 147.19,27.11 | ADDER8-1:ADDER1-3:K1.A1 122.4,6.2 114.66,6.2 113.11,7.75 ADDER8-1:ADDER1-3:D2.C | 115.43,30.21 115.43,10.85 113.11,8.52 ADDER8-1:ADDER1-3:D2.C | 81.34,30.21 79.79,30.21 ADDER8-1:ADDER1-2:D4.C | 81.34,30.21 88.32,30.21 ADDER8-1:ADDER1-2:K2.A1 | ADDER8-1:ADDER1-2:D2.C 79.79,6.97 80.57,6.2 88.32,6.2 ADDER8-1:ADDER1-2:K1.A1 89.09,6.2 90.64,7.75 112.33,7.75 ADDER8-1:ADDER1-3:D2.C | 81.34,30.21 81.34,9.3 79.79,7.75 ADDER8-1:ADDER1-2:D2.C | 51.13,6.2 46.48,6.2 45.71,6.97 ADDER8-1:ADDER1-1:D2.C | 51.13,6.2 55,6.2 ADDER8-1:ADDER1-1:K1.A1 55.78,6.2 57.33,7.75 79.02,7.75 ADDER8-1:ADDER1-2:D2.C | 51.13,30.21 45.71,30.21 ADDER8-1:ADDER1-1:D4.C | 51.13,30.21 52.68,30.21 | 52.68,30.21 55,30.21 ADDER8-1:ADDER1-1:K2.A1 | 55.78,54.23 55.78,51.13 SUB_XOR1:K4.2 55.78,50.35 52.68,47.26 52.68,30.21 | 55.78,54.23 55.78,58.88 SUB_XOR1:K5.2 | SUB_XOR1:D10.C 41.83,62.75 40.28,61.2 40.28,57.33 41.83,55.78 41.83,54.23 SUB_XOR1:D8.C 42.61,54.23 55.78,54.23 | 51.13,30.21 51.13,6.2 | 14.72,51.91 14.72,58.88 SUB_XOR1:K2.2 14.72,59.65 12.78,61.59 | 14.72,51.91 14.72,50.35 SUB_XOR1:K3.2 14.72,49.58 14.72,29.44 | 14.72,51.91 3.87,51.91 SUB_XOR1:D6.C | 12.78,61.59 12.39,61.98 3.87,61.98 SUB_XOR1:D4.C | 14.72,29.44 10.85,29.44 ADDER8-1:ADDER1-0:D4.C 10.07,29.44 10.07,24.79 5.42,20.14 ADDER8-1:K1.2 5.42,19.37 8.52,16.27 8.52,12.39 10.07,10.85 ADDER8-1:ADDER1-0:D2.C 10.85,10.07 | 14.72,29.44 20.92,29.44 ADDER8-1:ADDER1-0:K2.A1 | 10.85,10.07 14.72,6.2 20.14,6.2 ADDER8-1:ADDER1-0:K1.A1
  Bottom 1.397: 10.85,10.07 8.52,7.75 ADDER8-1:D2.C | 135.19,85.6 134.8,85.22 ENABLE4-4:D2.C | 135.19,85.6 135.57,85.99 141.77,85.99 ENABLE4-4:K1.A1 | 144.87,95.29 142.54,95.29 | 142.54,95.29 140.22,95.29 OUTPUT4-1:LED3.K | OUTPUT4-1:LED0.K 154.94,95.29 150.29,95.29 OUTPUT4-1:LED1.K 149.52,95.29 144.87,95.29 | 144.87,95.29 OUTPUT4-1:LED2.K | 142.54,95.29 142.54,86.77 ENABLE4-4:K1.A1 | 114.66,95.29 117.75,95.29 OUTPUT4-2:LED2.K 118.53,95.29 123.18,95.29 | 114.66,95.29 113.11,95.29 OUTPUT4-2:LED3.K | 123.18,95.29 127.83,95.29 OUTPUT4-2:LED0.K 128.6,95.29 128.6,92.19 135.19,85.6 | 123.18,95.29 OUTPUT4-2:LED1.K | 114.66,95.29 114.66,87.54 ENABLE4-3:K1.A1 114.66,86.77 113.11,85.22 107.68,85.22 ENABLE4-3:D2.C 106.91,84.44 89.09,84.44 86.77,86.77 SUB_XOR1:K1.A1 85.99,87.54 85.99,93.74 | 85.99,93.74 85.99,96.06 INC/DEC_FILTER1:D2.C 85.99,96.84 90.64,96.84 SUB_XOR1:D2.C | 70.5,95.29 65.85,95.29 INPUT4-2:LED1.K 65.08,95.29 61.2,95.29 60.81,94.9 | 60.43,95.29 55.78,95.29 INPUT4-2:LED3.K 55,95.29 50.35,95.29 INPUT4-1:LED0.K 49.58,95.29 45.71,95.29 INPUT4-1:LED1.K 44.93,95.29 40.28,95.29 INPUT4-1:LED2.K 39.51,95.29 34.86,95.29 | 60.43,95.29 60.81,94.9 | 60.81,94.9 61.2,94.51 61.2,87.54 INC/DEC_FILTER1:K1.A1 61.2,86.77 55.78,81.34 54.23,81.34 ENABLE4-2:D2.C | 60.43,95.29 INPUT4-2:LED2.K | 85.99,93.74 72.05,93.74 70.5,95.29 | 70.5,95.29 INPUT4-2:LED0.K | 6.97,95.29 6.97,88.32 6.2,87.54 ENABLE4-1:K1.A1 | 6.97,95.29 6.97,100.71 PWR_BLK:PWR.1 | 24.79,95.29 20.14,95.29 INPUT3-1:LED2.K 19.37,95.29 6.97,95.29 | 24.79,95.29 28.66,95.29 INPUT3-1:LED0.K 29.44,95.29 34.09,95.29 34.47,94.9
  Bottom 1.397: 24.79,95.29 INPUT3-1:LED1.K | 34.86,95.29 34.47,94.9 | 34.47,94.9 34.09,94.51 34.09,87.54 ENABLE4-2:K1.A1 33.31,86.77 27.89,81.34 26.34,81.34 ENABLE4-1:D2.C 25.57,80.57 25.57,74.37 12.78,61.59 | 34.86,95.29 INPUT4-1:LED3.K | 147.19,45.71 147.19,65.85 144.09,68.95 144.09,84.44 142.54,85.99 ENABLE4-4:K1.A1
  pour Bottom (isolate 0.406): 0,108.71 161.54,108.71 161.54,0 0,0
INC/DEC  (via drill 0.25)  (2 unrouted)
  Top 1.397: INC/DEC_FILTER1:D1.C 74.61,95.57 74.61,87 INC/DEC_FILTER1:K1.A2 | 24.45,97.16 23.18,95.89 23.18,81.28 32.07,72.39 42.86,72.39 43.5,71.75 45.4,71.75 46.04,72.39 55.88,72.39 v55.88,77.79
  Bottom 1.397: v55.88,77.79 65.09,87 INC/DEC_FILTER1:K1.A2
INC/DEC_FILTER1:D$1
  Bottom 1.397: INC/DEC_FILTER1:D2.A INC/DEC_FILTER1:D1.A
INPUT3-1:IN1  (1 unrouted)
N$1  (via drill 0.25)
  Top 1.397: v16.83,93.66 18.41,95.25 18.41,101.28 23.18,106.05 45.4,106.05 45.4,102.87 INPUT4-1:X1.4
  Bottom 1.397: INPUT4-1:LED0.A 45.72,102.23 45.72,102.87 INPUT4-1:X1.4 | v16.83,93.66 16.83,86.04 20.64,82.23 20.64,80.01 18.73,78.11 18.73,74.3 ENABLE4-1:K1.44
N$2  (via drill 0.25)
  Top 1.397: v26.35,84.45 31.43,84.45 v31.43,100.97
  Bottom 1.397: 43.81,100.97 43.81,99.06 INPUT4-1:LED1.A | 43.81,100.97 43.81,102.87 INPUT4-1:X1.3 | ENABLE4-1:K1.34 15.88,74.3 17.78,72.39 19.37,72.39 23.81,76.83 23.81,81.92 v26.35,84.45 | 43.81,100.97 v31.43,100.97
N$3  (via drill 0.25)
  Top 1.397: INPUT4-1:LED2.A 41.27,99.06 41.27,102.87 INPUT4-1:X1.2 | v15.24,93.66 15.24,95.89 v16.19,96.84
  Bottom 1.397: ENABLE4-1:K1.24 10.79,74.3 16.19,79.69 16.19,84.45 15.24,85.41 v15.24,93.66 | v16.19,96.84 16.83,96.84 19.37,99.38 35.88,99.38 37.47,97.79 INPUT4-1:LED2.A
N$4  (via drill 0.25)
  Top 1.397: 39.21,102.71 34.92,98.42 INPUT4-1:LED3.A | 39.21,102.71 39.37,102.87 INPUT4-1:X1.1 | v26.67,104.46 38.73,104.46 38.73,103.19 39.21,102.71
  Bottom 1.397: ENABLE4-1:K1.14 6.35,74.3 11.75,79.69 11.75,81.6 8.26,85.09 4.76,85.09 3.49,86.36 3.49,99.69 8.26,104.46 v26.67,104.46
N$5  (via drill 0.25)
  Top 1.397: INPUT4-2:LED0.A 70.48,98.42 66.04,102.87 INPUT4-2:X1.4 | v52.07,96.84 52.07,79.69 46.67,74.3 ENABLE4-2:K1.44
  Bottom 1.397: v52.07,96.84 56.52,101.28 64.45,101.28 66.04,102.87 INPUT4-2:X1.4
N$6
  Top 1.397: INPUT4-2:LED1.A 64.14,99.06 64.14,102.87 INPUT4-2:X1.3 63.82,103.5 63.82,104.46 49.53,104.46 43.5,98.42 43.5,96.52 40.32,93.34 40.32,75.88 41.91,74.3 ENABLE4-2:K1.34
N$7  (via drill 0.25)
  Top 1.397: INPUT4-2:X1.2 61.59,102.87 61.59,99.06 INPUT4-2:LED2.A v56.2,93.66 | v38.73,84.45 35.88,81.6 35.88,76.2 37.78,74.3 ENABLE4-2:K1.24
  Bottom 1.397: v38.73,84.45 41.27,84.45 50.48,93.66 v56.2,93.66
N$8  (via drill 0.25)
  Top 1.397: 55.72,98.9 55.24,98.42 INPUT4-2:LED3.A | 55.72,98.9 59.69,102.87 INPUT4-2:X1.1 | v44.13,92.08 48.58,96.52 48.58,98.42 49.53,99.38 55.24,99.38 55.72,98.9
  Bottom 1.397: v44.13,92.08 42.23,92.08 31.43,81.28 31.43,80.01 33.34,78.11 33.34,74.3 ENABLE4-2:K1.14
N$9
  Bottom 1.397: ENABLE4-2:K1.11 34.92,80.64 36.83,82.55 48.58,82.55 60.64,70.48 61.28,70.48 INC/DEC_FILTER1:K1.12
N$10  (via drill 0.25)
  Top 1.397: v62.55,65.09 65.72,68.26 65.72,70.17 INC/DEC_FILTER1:K1.22
  Bottom 1.397: ENABLE4-2:K1.21 39.37,80.64 43.81,76.2 48.26,76.2 59.37,65.09 v62.55,65.09
N$11  (via drill 0.25)
  Top 1.397: v68.58,66.67 69.85,67.94 69.85,70.17 INC/DEC_FILTER1:K1.32
  Bottom 1.397: v68.58,66.67 60.01,66.67 47.94,78.74 44.13,78.74 42.23,80.64 ENABLE4-2:K1.31
N$12
  Bottom 1.397: ENABLE4-2:K1.41 48.26,80.64 60.64,68.26 72.39,68.26 74.3,70.17 INC/DEC_FILTER1:K1.42
N$13  (via drill 0.25)
  Top 1.397: ADDER8-1:ADDER1-0:D3.C 20.95,40.01 ADDER8-1:ADDER1-0:K2.A2 | v21.27,49.85 21.27,78.11 18.73,80.64 ENABLE4-1:K1.41
  Bottom 1.397: v21.27,49.85 21.27,43.18 20.95,42.86 ADDER8-1:ADDER1-0:K2.A2
N$14  (via drill 0.25)
  Top 1.397: ADDER8-1:ADDER1-1:K2.A2 55.24,42.55 53.98,41.27 53.98,40.64 ADDER8-1:ADDER1-1:D3.C v37.78,47.94 | v16.51,57.15 16.51,60.33 12.38,64.45 12.38,79.06 13.97,80.64 ENABLE4-1:K1.31
  Bottom 1.397: v16.51,57.15 25.72,47.94 v37.78,47.94
N$15  (via drill 0.25)
  Top 1.397: v8.26,27.62 17.14,18.73 v17.14,13.02 | v87.95,1.91 91.44,5.4 v91.44,9.53 | v86.04,9.53 83.82,11.75 81.28,11.75 80.33,10.79 77.47,10.79 v77.47,19.05 | v77.47,32.38 77.47,38.73 ADDER8-1:ADDER1-2:D3.C
  Bottom 1.397: ADDER8-1:ADDER1-2:D3.C 87,40.64 88.9,42.55 ADDER8-1:ADDER1-2:K2.A2 | ENABLE4-1:K1.21 9.21,80.64 1.27,72.71 1.27,32.38 6.03,27.62 v8.26,27.62 | v17.14,13.02 28.26,1.91 v87.95,1.91 | v86.04,9.53 v91.44,9.53 | v77.47,32.38 v77.47,19.05
N$16  (via drill 0.25)
  Top 1.397: v101.28,106.68 111.44,96.52 111.44,70.8 115.89,66.36 126.05,66.36 v126.05,61.28
  Bottom 1.397: ADDER8-1:ADDER1-3:D3.C 120.65,40.64 122.56,42.55 ADDER8-1:ADDER1-3:K2.A2 122.87,43.18 127,47.31 127,60.33 v126.05,61.28 | v101.28,106.68 8.26,106.68 1.91,100.33 1.91,85.72 5.4,82.23 5.4,80.64 ENABLE4-1:K1.11
N$17
  Top 1.397: SUB_XOR1:D9.C 51.44,59.69 SUB_XOR1:K5.1
  Bottom 1.397: INC/DEC_FILTER1:K1.41 74.61,80.64 74.61,76.83 76.52,74.93 76.52,69.53 72.39,65.41 69.53,65.41 67.31,63.18 55.24,63.18 51.75,59.69 SUB_XOR1:K5.1
N$18
  Top 1.397: INC/DEC_FILTER1:K1.31 69.85,80.64 65.41,76.2 63.18,76.2 63.18,67.94 60.96,65.72 60.96,59.37 52.39,50.8 SUB_XOR1:K4.1
  Bottom 1.397: SUB_XOR1:D7.C 47.62,50.8 52.07,50.8 SUB_XOR1:K4.1
N$19  (via drill 0.25)
  Top 1.397: SUB_XOR1:K3.1 10.79,50.16 SUB_XOR1:D5.C 6.99,50.8 5.08,52.7 5.08,60.33 7.3,62.55 7.3,82.55 15.24,82.55 16.19,81.6 16.19,69.53 v19.68,66.04 | v59.37,88.9 62.23,88.9 64.14,87 64.14,82.23 65.72,80.64 INC/DEC_FILTER1:K1.21 | v47.31,84.14 44.13,80.96 v44.13,73.34
  Bottom 1.397: v59.37,88.9 54.61,84.14 v47.31,84.14 | v44.13,73.34 43.18,72.39 26.04,72.39 v19.68,66.04
N$20  (via drill 0.25)
  Top 1.397: SUB_XOR1:D3.C 10.79,59.69 SUB_XOR1:K2.1 11.43,59.05 11.43,55.56 18.1,55.56 19.05,56.52 19.05,56.83 v19.68,57.47 | v38.73,59.37 38.73,59.69 42.23,59.69 44.45,61.91 44.45,63.18 55.56,63.18 57.78,65.41 57.78,77.15 61.28,80.64 INC/DEC_FILTER1:K1.11
  Bottom 1.397: v38.73,59.37 36.83,57.47 v19.68,57.47
N$21  (via drill 0.25)
  Top 1.397: v117.16,14.29 ADDER8-1:ADDER1-3:D1.C | v113.03,25.4 111.12,27.3 111.12,42.86 104.14,49.85 104.14,84.14 89.53,84.14 87.63,82.23 87.63,81.28 87,80.64 SUB_XOR1:K1.11
  Bottom 1.397: v117.16,14.29 118.43,14.29 122.56,18.41 ADDER8-1:ADDER1-3:K1.A2 | ADDER8-1:ADDER1-3:D1.C v113.03,25.4
N$22  (via drill 0.25)
  Top 1.397: 81.28,22.23 88.9,22.23 ADDER8-1:ADDER1-2:K1.A2 | 81.28,22.23 v79.38,22.23 | 81.28,22.23 81.28,41.27 79.06,43.5 79.06,47.62 80.01,48.58 80.01,50.8 82.87,50.8 88.9,56.83 88.9,59.37 93.03,63.5 93.03,79.06 91.44,80.64 SUB_XOR1:K1.21
  Bottom 1.397: v79.38,22.23 ADDER8-1:ADDER1-2:D1.C
N$23  (via drill 0.25)
  Top 1.397: v47.62,20.32 55.24,20.32 ADDER8-1:ADDER1-1:K1.A2 | v86.68,43.81 92.71,49.85 92.71,59.37 97.47,64.14 97.47,75.25 96.52,76.2 96.52,79.69 95.57,80.64 SUB_XOR1:K1.31 | v77.47,43.81 74.61,46.67 v74.61,51.44 | v69.53,50.48 69.53,49.53 63.5,43.5 63.5,23.18 v61.59,21.27
  Bottom 1.397: v47.62,20.32 ADDER8-1:ADDER1-1:D1.C | v77.47,43.81 v86.68,43.81 | v74.61,51.44 73.34,52.7 71.75,52.7 v69.53,50.48 | v61.59,21.27 59.69,19.37 59.69,12.06 58.74,11.11 57.47,11.11 55.24,13.34 ADDER8-1:ADDER1-1:K1.A2
N$24  (via drill 0.25)
  Top 1.397: v93.34,40.01 93.34,43.5 101.92,52.07 101.92,78.74 100.01,80.64 SUB_XOR1:K1.41 | v88.58,35.24 91.12,32.7 v91.12,15.88 | v91.12,11.43 81.92,2.22 29.21,2.22 29.21,10.79 27.62,12.38 22.54,12.38 22.54,17.14 20.95,18.73 ADDER8-1:ADDER1-0:K1.A2
  Bottom 1.397: ADDER8-1:ADDER1-0:D1.C 19.37,20.32 20.64,19.05 ADDER8-1:ADDER1-0:K1.A2 | v88.58,35.24 v93.34,40.01 | v91.12,11.43 v91.12,15.88
N$25  (via drill 0.25)  (1 unrouted)
  Top 1.397: v133.03,25.4 130.33,28.1 | 130.33,28.1 128.91,29.53 | v150.81,25.4 155.57,30.16 155.57,30.8 | v136.84,75.25 135.25,73.66 135.25,46.99 130.81,42.55 130.81,28.57 130.33,28.1
  Bottom 1.397: v150.81,25.4 v133.03,25.4 | ENABLE4-3:K1.14 116.2,74.3 119.7,77.79 134.3,77.79 v136.84,75.25
N$26
  Bottom 1.397: ENABLE4-3:K1.44 130.18,74.3 144.78,59.69 ZERO_DETECT1:K4.3
N$40  (via drill 0.25)
  Top 1.397: ZERO_DETECT1:D7.C 129.54,59.69 ZERO_DETECT1:K4.1 | v144.46,53.34 147.96,56.83 147.96,64.14 153.35,69.53 153.35,72.07 154.94,73.66 ENABLE4-4:K1.44
  Bottom 1.397: ADDER8-1:ADDER1-0:K1.21 27.3,9.84 27.3,9.21 33.02,3.49 155.57,3.49 159.07,6.99 159.07,69.85 155.26,73.66 ENABLE4-4:K1.44 | v144.46,53.34 135.89,53.34 129.86,59.37 ZERO_DETECT1:K4.1
N$41
  Top 1.397: ZERO_DETECT1:D5.C 125.09,50.8 129.54,50.8 ZERO_DETECT1:K3.1 129.86,51.44 131.44,53.02 131.44,76.83 137.48,76.83 138.43,75.88 138.43,71.75 147,71.75 147.32,71.44 148.27,71.44 150.5,73.66 ENABLE4-4:K1.34
  Bottom 1.397: ADDER8-1:ADDER1-1:K1.21 61.59,11.43 64.45,14.29 64.45,36.2 66.04,37.78 66.04,43.5 67.94,45.4 108.58,45.4 109.54,44.45 117.79,44.45 119.38,46.04 119.38,49.85 120.97,51.44 ZERO_DETECT1:D5.C
N$42  (via drill 0.25)
  Top 1.397: ADDER8-1:ADDER1-2:K1.21 95.25,9.84 99.69,5.4 99.69,4.76 100.97,3.49 159.07,3.49 159.07,72.39 155.89,75.56 146.69,75.56 146.69,73.66 ENABLE4-4:K1.24 145.73,73.66 140.97,78.42 v115.25,78.42
  Bottom 1.397: ZERO_DETECT1:D3.C 88.27,59.05 90.81,59.05 ZERO_DETECT1:K2.1 91.44,59.37 100.33,68.26 105.09,68.26 v115.25,78.42
N$43  (via drill 0.25)
  Top 1.397: ZERO_DETECT1:D1.C 88.27,50.8 90.81,50.8 ZERO_DETECT1:K1.1 | v117.16,28.57 114.94,30.8 114.94,41.27 112.87,43.34 | v107.31,48.9 112.87,43.34 | v117.79,63.18 113.35,58.74 113.35,43.81 112.87,43.34
  Bottom 1.397: ENABLE4-4:K1.14 136.21,73.66 133.67,76.2 127,76.2 125.09,74.3 ENABLE4-3:K1.34 123.51,73.66 123.51,73.03 120.97,70.48 120.97,66.36 v117.79,63.18 | ADDER8-1:ADDER1-3:K1.21 128.91,11.43 124.46,15.88 124.46,21.27 v117.16,28.57 | v107.31,48.9 92.71,48.9 91.12,50.48 ZERO_DETECT1:K1.1
N$44  (via drill 0.25)  (1 unrouted)
  Top 1.397: 155.57,11.43 157.48,13.34 157.48,39.69 153.99,43.18 143.83,43.18 143.83,46.99 140.34,50.48 v140.34,54.93 | v128.59,72.39 119.38,72.39 119.38,74.3 ENABLE4-3:K1.24
  Bottom 1.397: v140.34,54.93 140.34,60.64 v128.59,72.39
OVERFLOW
  Top 1.397: OUTPUT4-2:LED2.A 119.22,98.9 | 119.22,98.9 119.38,99.06 119.38,102.87 OUTPUT4-2:X1.2 | ENABLE4-3:K1.21 119.38,80.64 119.7,80.96 119.7,98.42 119.22,98.9
R0
  Top 1.397: 153.83,99.54 154.94,98.42 OUTPUT4-1:LED0.A | 153.83,99.54 150.5,102.87 OUTPUT4-1:X1.4 | ENABLE4-4:K1.41 154.94,80.01 153.35,81.6 153.35,99.06 153.83,99.54
R1
  Top 1.397: OUTPUT4-1:LED1.A 148.75,98.9 | 148.75,98.9 148.59,99.06 148.59,102.87 OUTPUT4-1:X1.3 | ENABLE4-4:K1.31 150.5,80.01 148.27,82.23 148.27,98.42 148.75,98.9
R2
  Top 1.397: OUTPUT4-1:LED2.A 145.89,98.9 | 145.89,98.9 146.05,99.06 146.05,102.87 OUTPUT4-1:X1.2 | ENABLE4-4:K1.21 146.37,80.01 146.37,98.42 145.89,98.9
R3
  Top 1.397: OUTPUT4-1:X1.1 144.15,102.87 139.7,98.42 OUTPUT4-1:LED3.A 138.11,96.2 138.11,83.82 141.92,80.01 ENABLE4-4:K1.11
SIGN
  Top 1.397: OUTPUT4-2:LED1.A 122.08,98.9 | 122.08,98.9 121.92,99.06 121.92,102.87 OUTPUT4-2:X1.3 | ENABLE4-3:K1.31 123.19,80.64 121.6,82.23 121.6,98.42 122.08,98.9
SUB  (via drill 0.25)
  Top 1.397: SUB_XOR1:D1.C 100.01,95.57 100.01,87 SUB_XOR1:K1.A2 | ADDER8-1:D1.C 5.08,15.88 ADDER8-1:K1.1 5.08,16.83 1.27,20.64 1.27,88.9 v9.21,96.84
  Bottom 1.397: v9.21,96.84 13.97,96.84 18.41,101.28 25.08,101.28 26.67,102.87 27.3,102.87 28.89,104.46 93.03,104.46 SUB_XOR1:D1.C
SUB_XOR1:D$1
  Bottom 1.397: SUB_XOR1:D2.A SUB_XOR1:D1.A
SUB_XOR1:D$2
  Bottom 1.397: SUB_XOR1:D4.A SUB_XOR1:D3.A
SUB_XOR1:D$3
  Bottom 1.397: SUB_XOR1:D5.A 3.17,47.62 SUB_XOR1:D6.A
SUB_XOR1:D$4
  Bottom 1.397: SUB_XOR1:D8.A SUB_XOR1:D7.A
SUB_XOR1:D$5
  Bottom 1.397: SUB_XOR1:D9.A 43.18,57.15 SUB_XOR1:D10.A
SUB_XOR1:N$1
  Bottom 1.397: SUB_XOR1:K5.5 77.15,59.69 77.15,60.33 85.09,68.26 97.79,68.26 99.69,70.17 SUB_XOR1:K1.42
SUB_XOR1:N$2  (via drill 0.25)
  Top 1.397: v89.85,76.2 89.22,76.83 89.22,81.6 90.17,82.55 98.11,82.55 98.11,76.83 99.69,75.25 99.69,74.3 SUB_XOR1:K1.44
  Bottom 1.397: v89.85,76.2 85.41,76.2 73.03,63.82 71.12,63.82 66.99,59.69 SUB_XOR1:K5.3
SUB_XOR1:N$3  (via drill 0.25)
  Top 1.397: v69.85,60.33 69.85,53.02 67.63,50.8 SUB_XOR1:K4.3 | v84.14,77.15 v84.14,72.71
  Bottom 1.397: v69.85,60.33 71.75,62.23 73.66,62.23 v84.14,72.71 | v84.14,77.15 84.77,77.79 91.76,77.79 95.25,74.3 SUB_XOR1:K1.34
SUB_XOR1:N$4  (via drill 0.25)
  Top 1.397: v81.28,67.63 81.28,54.29 77.79,50.8 SUB_XOR1:K4.5
  Bottom 1.397: v81.28,67.63 86.04,72.39 93.34,72.39 95.25,70.48 SUB_XOR1:K1.32
SUB_XOR1:N$5  (via drill 0.25)
  Top 1.397: v29.53,55.88 29.53,53.34 26.35,50.16 SUB_XOR1:K3.3 | v39.37,55.88 45.09,55.88 45.09,60.33 46.35,61.59 v57.78,61.59 | v73.98,57.78 74.93,58.74 74.93,67.94 v78.74,71.75 | v82.55,77.79 83.5,78.74 87.63,78.74 87.63,76.2 89.53,74.3 SUB_XOR1:K1.24
  Bottom 1.397: v39.37,55.88 v29.53,55.88 | v57.78,61.59 62.23,61.59 66.04,57.78 v73.98,57.78 | v78.74,71.75 82.55,75.56 v82.55,77.79
SUB_XOR1:N$6  (via drill 0.25)
  Top 1.397: v43.81,50.48 45.09,49.21 45.09,48.26 46.35,46.99 49.85,46.99 49.85,47.94 50.48,48.58 50.48,52.07 59.37,60.96 v59.37,74.93 | v78.74,73.98 80.96,71.75 80.96,71.44 87.31,65.09 91.12,65.09 91.12,70.17 SUB_XOR1:K1.22
  Bottom 1.397: v43.81,50.48 43.5,50.8 41.59,50.8 40.96,50.16 36.51,50.16 SUB_XOR1:K3.5 | v59.37,74.93 63.18,78.74 71.12,78.74 72.71,80.33 72.71,81.6 73.66,82.55 75.25,82.55 78.74,79.06 v78.74,73.98
SUB_XOR1:N$7  (via drill 0.25)
  Top 1.397: v26.67,52.7 26.67,59.05 26.35,59.37 SUB_XOR1:K2.3 | v40.96,52.7 41.59,52.07 45.09,52.07 46.35,53.34 48.9,53.34 v48.9,49.21 | v52.07,48.9 64.77,48.9 64.77,65.09 68.26,68.58 68.26,75.25 69.22,76.2 82.55,76.2 82.55,72.07 83.5,71.12 84.77,71.12 86.68,73.03 86.68,74.3 SUB_XOR1:K1.14
  Bottom 1.397: v40.96,52.7 v26.67,52.7 | v48.9,49.21 51.44,49.21 51.75,48.9 v52.07,48.9
SUB_XOR1:N$8  (via drill 0.25)
  Top 1.397: v58.1,44.13 58.1,42.55 49.53,33.97 49.53,33.66 44.13,33.66 43.18,34.61 43.18,40.01 34.29,48.9 34.29,57.47 36.2,59.37 SUB_XOR1:K2.5 | v89.22,66.67 87,68.9 87,70.17 SUB_XOR1:K1.12
  Bottom 1.397: v58.1,44.13 70.17,56.2 78.11,56.2 83.5,61.59 84.14,61.59 v89.22,66.67
ZERO
  Top 1.397: 126.52,100.17 128.27,98.42 OUTPUT4-2:LED0.A | 126.52,100.17 123.83,102.87 OUTPUT4-2:X1.4 | ENABLE4-3:K1.41 127.64,80.64 126.05,82.23 126.05,99.69 126.52,100.17
ZERO_DETECT1:D$1
  Bottom 1.397: ZERO_DETECT1:D1.A 83.19,49.53 ZERO_DETECT1:D2.A
ZERO_DETECT1:D$2
  Bottom 1.397: ZERO_DETECT1:D3.A 83.19,57.78 ZERO_DETECT1:D4.A
ZERO_DETECT1:D$3
  Bottom 1.397: ZERO_DETECT1:D6.A ZERO_DETECT1:D5.A
ZERO_DETECT1:D$4
  Bottom 1.397: ZERO_DETECT1:D7.A 121.28,57.15 ZERO_DETECT1:D8.A
ZERO_DETECT1:GND
  Top 1.397: ZERO_DETECT1:K1.2 94.93,50.8 94.93,58.74 ZERO_DETECT1:K2.2 | ZERO_DETECT1:D2.C 85.09,55.88 85.09,61.59 ZERO_DETECT1:D4.C | ZERO_DETECT1:K3.2 133.67,50.8 133.67,59.37 ZERO_DETECT1:K4.2 | ZERO_DETECT1:D6.C 123.19,55.88 123.19,60.96 ZERO_DETECT1:D8.C
  Bottom 1.397: ZERO_DETECT1:D2.C 88.58,53.98 93.34,58.74 94.61,58.74 ZERO_DETECT1:K2.2 95.25,59.37 103.82,59.37 106.05,61.59 119.38,61.59 120.65,62.87 ZERO_DETECT1:D8.C 128.91,62.87 132.08,59.69 133.35,59.69 ZERO_DETECT1:K4.2
ZERO_DETECT1:N$2
  Bottom 1.397: ZERO_DETECT1:K1.3 106.36,50.8 106.36,53.98 111.12,58.74 ZERO_DETECT1:K2.4
ZERO_DETECT1:N$3  (via drill 0.25)
  Top 1.397: v124.46,64.77 112.08,64.77 106.36,59.05 ZERO_DETECT1:K2.3 | v138.75,58.74 142.88,54.61 142.88,50.16 144.15,48.9 149.86,48.9 149.86,50.48 ZERO_DETECT1:K3.4
  Bottom 1.397: v124.46,64.77 132.72,64.77 v138.75,58.74
ZERO_DETECT1:N$4
  Top 1.397: ZERO_DETECT1:K3.3 145.1,50.8 149.86,55.56 149.86,59.37 ZERO_DETECT1:K4.4

## Text on the board
tPlace: AUE | INC-DEC | SUB | A3 | A2 | A1 | A0 | B3 | B2 | B1 | B0 | CRRY | OVER | SIGN | ZERO | R3 | R2 | R1 | R0 | 12VDC | ARITHMETIC UNIT REV A | GND
bPlace: JAKE KARNES | OCTOBER 2017